# Altium PCB PCB1.PcbDoc
Units mil, origin at the board's own origin, x right, y up, seen from the top; angles counter-clockwise.
Board outline 830 x 850 mil, 2 copper layers (Top Layer, Bottom Layer); 15 components, 12 nets, 64 pads, 20 vias.
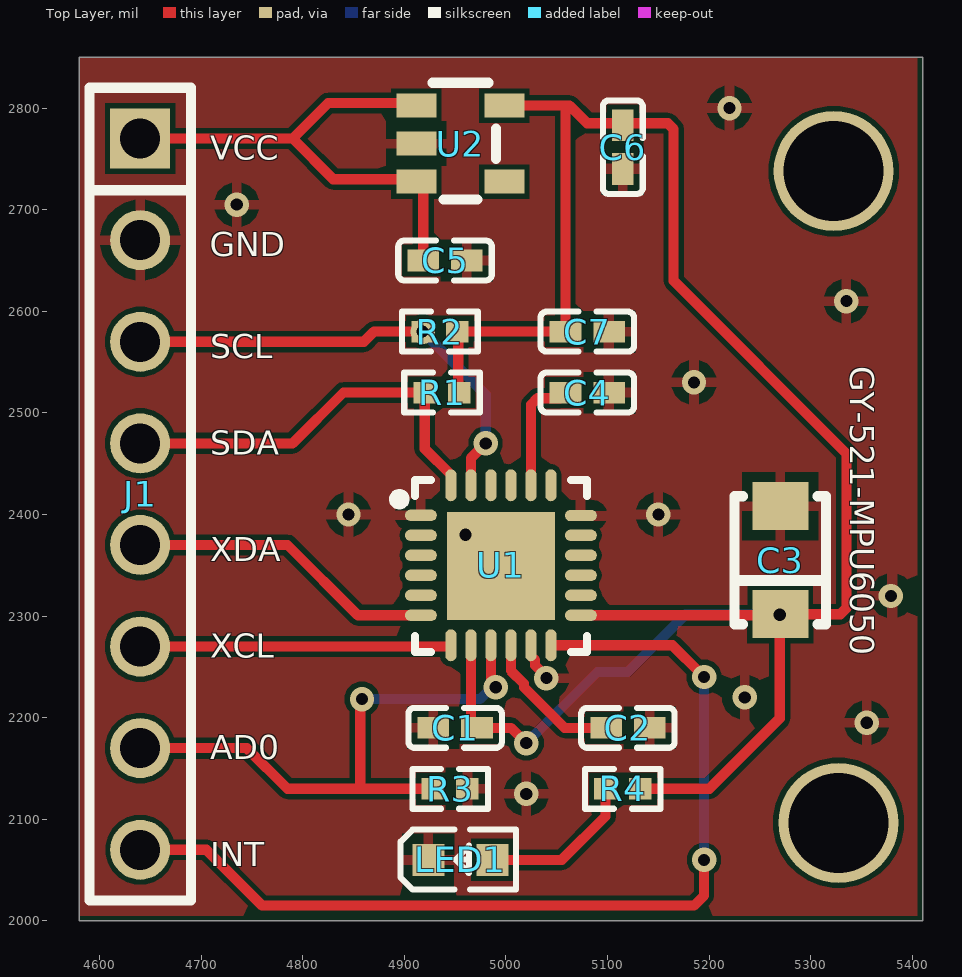
[diagram p0: Top Layer view]
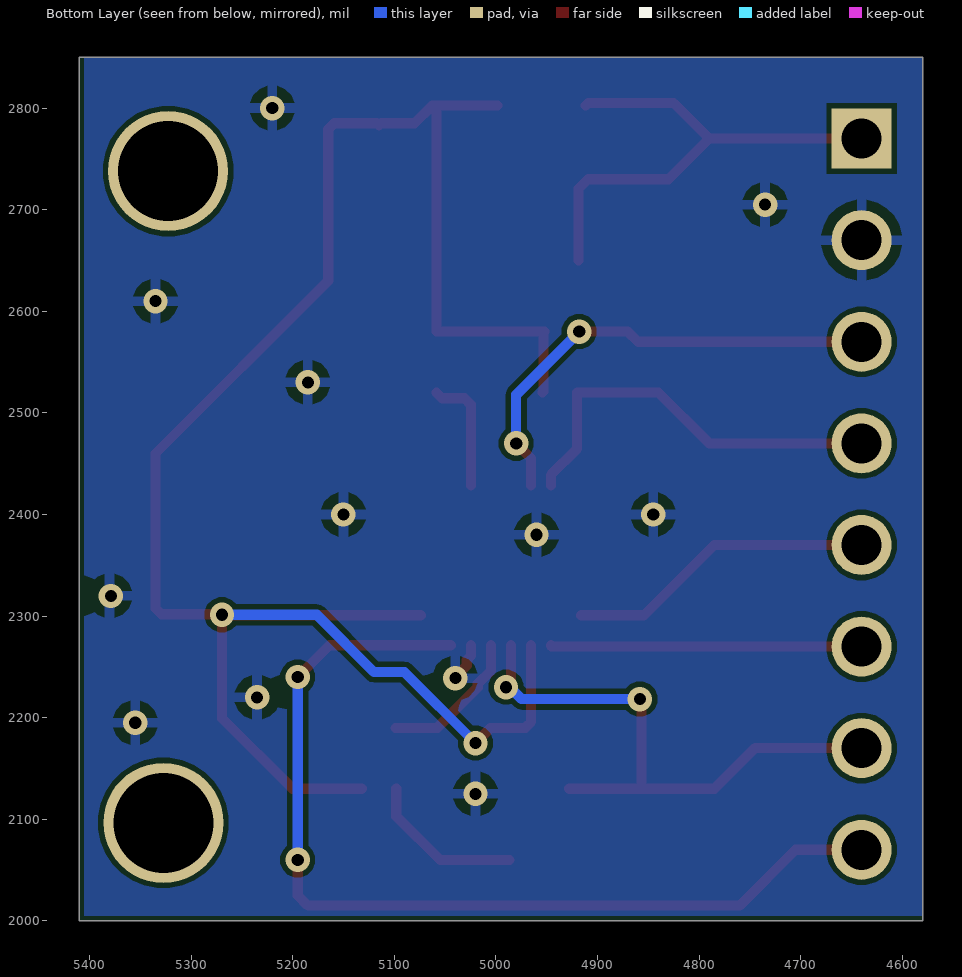
[diagram p1: Bottom Layer view, seen from below]

## Layer stack, top to bottom
Top Solder: solder mask 0.4, Solder Resist, Dk 3.5
Top Layer: signal copper 1.4
Dielectric 1: dielectric 12.6, FR-4, Dk 4.8
Bottom Layer: signal copper 1.4
Bottom Solder: solder mask 0.4, Solder Resist, Dk 3.5

## Board outline
4580,2000 4580,2850 5410,2850 5410,2000

## Design rules (kind name [scope] priority, off if disabled: settings)
Clearance [All] p1: gap=5 ignorepadtopadclearanceinfootprint=FALSE
PolygonConnect [All] p1: connectstyle=Relief reliefconductorwidth=10 reliefentries=4 polygonreliefangle="90 Angle" airgapwidth=10
RoutingVias [All] p1: holewidth=28 width=50 viastyle="Through Hole" minholewidth=28 minwidth=50 maxholewidth=28 maxwidth=50
SolderMaskExpansion [All] p1: expansion=4 istentingtop=FALSE
SupplyNets "Schematic Supply Nets_2" [InNet('GND')] p1: voltage=0.000
SupplyNets "Schematic Supply Nets_1" [InNet('+MAX6V')] p2: voltage=0.000
SupplyNets "Schematic Supply Nets" [InNet('+3V3')] p3: voltage=0.000
Width [All] p1: maxlimit=10 minlimit=10 preferedwidth=10
30 further rules are at their usual default settings.

## Components (designator, comment, footprint, x,y, rotation, side; value= is the part's Value field where it differs from the comment)
C1 "10nF" "C0402-10N F" 4950,2190 r180 top
C2 "10uF" "C0402-10u F" 5120,2190 r180 top
C3 "10uF" "CAP-SMD_L3.2-W1.6-10u F" 5270,2355 r90 top
C4 "2.2nF" "C0402-2.2n F" 5080,2520 r180 top
C5 "4.7uF" "C0402-4.7U F" 4940,2650 r180 top
C6 "10uF" "C0402-10u F" 5115,2761.46 r90 top
C7 "0.1uF" "C0402-0.1u f" 5080,2580 r180 top value=100nF
J1 "HDR-M-2.54_1x8" HDR-TH_8P-P2.54-V-M 4640,2420 r270 top
LED1 "LED-0603_R" LED0603-RD 4955,2060 r0 top
R1 "4.7kΩ" "R0402-4.7K ohm" 4937.04,2520 r0 top
R2 "4.7kΩ" "R0402-4.7K ohm" 4935,2580 r0 top
R3 "4.7kΩ" "R0402-4.7K ohm" 4945,2130 r180 top
R4 "2kΩ" "R0402-2.2K OHM" 5115,2130 r180 top
U1 "MPU-6050" QFN-24_L4.0-W4.0-P0.50-BL-EP2.7 4995,2350 r270 top
U2 "HX9193-33GB-N" SOT-23-5_L2.9-W1.6-P0.95-LS2.8-BL 4955,2765 r270 top

## Footprints (in the part's own frame and the unit in brackets; to place one, negate y for a bottom-side part, rotate by r counter-clockwise, add the part's x,y. Pads: shape width x height; smd on the part's side, far side on the other; paste and mask are expansions set on the pad)
"C0402-0.1u f" [mm]
  rect 0.79x0.54 smd paste-100 mask+0.051: 1(-0.545,0) 2(0.545,0)
  silkscreen extent -1.17,-0.5 1.17,0.5
"C0402-2.2n F" [mm]
  rect 0.79x0.54 smd paste-100 mask+0.051: 1(-0.545,0) 2(0.545,0)
  silkscreen extent -1.17,-0.5 1.17,0.5
"C0402-4.7U F" [mm]
  rect 0.79x0.54 smd paste-100 mask+0.051: 1(-0.545,0) 2(0.545,0)
  silkscreen extent -1.17,-0.5 1.17,0.5
"C0402-10N F" [mm]
  rect 0.79x0.54 smd paste-100 mask+0.051: 1(-0.545,0) 2(0.545,0)
  silkscreen extent -1.17,-0.5 1.17,0.5
"C0402-10u F" [mm]
  rect 0.79x0.54 smd paste-100 mask+0.051: 1(-0.545,0) 2(0.545,0)
  silkscreen extent -1.17,-0.5 1.17,0.5
"CAP-SMD_L3.2-W1.6-10u F" [mm]
  rect 1.2x1.4 smd: 1(-1.35,0) 2(1.35,0)
  silkscreen extent -1.6,-1.14 1.6,1.14
HDR-TH_8P-P2.54-V-M [mm]
  rect 1.5x1.5 hole 1: 1(-8.89,0)
  round 1.5 hole 1: 2(-6.35,0) 3(-3.81,0) 4(-1.27,0) 5(1.27,0) 6(3.81,0) 7(6.35,0) 8(8.89,0)
  silkscreen extent -10.16,-1.27 10.16,1.27
LED0603-RD [mm]
  rect 0.8x0.8 smd: 1(-0.799,0) 2(0.799,0)
  silkscreen extent -1.49,-0.75 1.39,0.76
QFN-24_L4.0-W4.0-P0.50-BL-EP2.7 [mm]
  oval 0.28x0.8 smd paste-100 mask+0.05: 1(-1.25,-2) 2(-0.75,-2) 3(-0.25,-2) 4(0.25,-2) 5(0.75,-2) 6(1.25,-2) 13(1.25,2) 14(0.75,2) 15(0.25,2) 16(-0.25,2) 17(-0.75,2) 18(-1.242,2)
  oval 0.8x0.28 smd paste-100 mask+0.05: 7(2,-1.25) 8(2,-0.75) 9(2,-0.25) 10(2,0.25) 11(2,0.75) 12(2,1.25) 19(-2,1.25) 20(-2,0.75) 21(-2,0.25) 22(-2,-0.25) 23(-2,-0.75) 24(-2,-1.25)
  rect 2.7x2.7 smd paste-100 mask+0.05: 25(0.012,0)
  silkscreen extent -2.14,-2.79 2.16,2.15
"R0402-2.2K OHM" [mm]
  rect 0.566x0.54 smd paste-100 mask+0.051: 1(-0.433,0) 2(0.433,0)
  silkscreen extent -0.94,-0.5 0.94,0.5
"R0402-4.7K ohm" [mm]
  rect 0.566x0.54 smd paste-100 mask+0.051: 1(-0.433,0) 2(0.433,0)
  silkscreen extent -0.94,-0.5 0.94,0.5
SOT-23-5_L2.9-W1.6-P0.95-LS2.8-BL [mm]
  rect 0.6x1 smd paste+0 mask+0.05: 1(-0.95,-1.1) 2(0,-1.1) 3(0.95,-1.1) 4(0.95,1.1) 5(-0.95,1.1)
  silkscreen extent -1.52,-0.7 1.4,0.89

## Part data
C1: library part CL05B103KB5NNNC, "50V 10nF X7R ±10% 0402 Multilayer Ceramic Capacitors MLCC - SMD/SMT ROHS", JLCPCB Part Class="Basic Part", LCSC Part Name="10nF ±10% 50V", Manufacturer=SAMSUNG(三星), Tolerance=±10%, Add into BOM=yes, Convert to PCB=yes, Datasheet=https://atta.szlcsc.com/upload/public/pdf/source/20160218/1457707763339.pdf, Device=CL05B103KB5NNNC, Manufacturer Part=CL05B103KB5NNNC, Supplier=LCSC, Supplier Footprint=0402, Supplier Part=C15195, Symbol=CL05B103KB5NNNC
C2 C6: library part CL05A106MP5NUNC_C315248, "10V 10uF X5R ±20% 0402 Multilayer Ceramic Capacitors MLCC - SMD/SMT ROHS", JLCPCB Part Class="Extended Part", LCSC Part Name="10uF ±20% 10V", Manufacturer=SAMSUNG(三星), Manufacturer Part=CL05A106MP5NUNC, Tolerance=±20%, Add into BOM=yes, Convert to PCB=yes, Datasheet=https://atta.szlcsc.com/upload/public/pdf/source/20231220/1EF805BAE1520675928CC4638D279E74.pdf, Device=CL05A106MP5NUNC_C315248, Supplier=LCSC, Supplier Footprint=0402, Supplier Part=C315248, Symbol=CL05A106MP5NUNC_C315248
C3: library part TPSA106K016R1000_C282116, "10uF 16V 1Ω@100kHz ±10% CASE-A-3216-18(mm) Tantalum Capacitors ROHS", Equivalent Series Resistance(ESR)=1Ω@100kHz, JLCPCB Part Class="Extended Part", LCSC Part Name="10uF ±10% 16V", Manufacturer="Kyocera AVX", Manufacturer Part=TPSA106K016R1000, Operating Temperature=-55℃~+125℃, Tolerance=±10%, Add into BOM=yes, Convert to PCB=yes, Datasheet=https://atta.szlcsc.com/upload/public/pdf/source/20181129/C308928_3E6DA6FC57C95F0966ACBCD944046350.pdf, Device=TPSA106K016R1000_C282116, Supplier=LCSC, Supplier Footprint=CASE-A-3216-18(mm), Supplier Part=C282116, Symbol=TPSA106K016R1000_C282116
C4: library part GCM155R71H222KA37D, "50V 2.2nF X7R ±10% 0402 Multilayer Ceramic Capacitors MLCC - SMD/SMT ROHS", JLCPCB Part Class="Extended Part", LCSC Part Name="2.2nF ±10% 50V", Manufacturer=muRata(村田), Temperature Coefficient=X7R, Tolerance=±10%, Voltage Rating=50V, Add into BOM=yes, Convert to PCB=yes, Datasheet=https://atta.szlcsc.com/upload/public/pdf/source/20170912/C126534_1505207904789963631.pdf, Device=GCM155R71H222KA37D, Manufacturer Part=GCM155R71H222KA37D, Supplier=LCSC, Supplier Footprint=0402, Supplier Part=C126534, Symbol=GCM155R71H222KA37D
C5: library part CL05A475MP5NRNC, "10V 4.7uF X5R ±20% 0402 Multilayer Ceramic Capacitors MLCC - SMD/SMT ROHS", JLCPCB Part Class="Basic Part", LCSC Part Name="4.7uF ±20% 10V", Manufacturer=SAMSUNG(三星), Tolerance=±20%, Add into BOM=yes, Convert to PCB=yes, Datasheet=https://atta.szlcsc.com/upload/public/pdf/source/20160218/1457707763339.pdf, Device=CL05A475MP5NRNC, Manufacturer Part=CL05A475MP5NRNC, Supplier=LCSC, Supplier Footprint=0402, Supplier Part=C23733, Symbol=CL05A475MP5NRNC
C7: library part GRM155R71H104KE14D, "50V 100nF X7R ±10% 0402 Multilayer Ceramic Capacitors MLCC - SMD/SMT ROHS", JLCPCB Part Class="Extended Part", LCSC Part Name="100nF ±10% 50V", Manufacturer=muRata(村田), Tolerance=±10%, Add into BOM=yes, Convert to PCB=yes, Datasheet=https://atta.szlcsc.com/upload/public/pdf/source/20180326/C77020_39BD49C951FF1AF0DB1F1FAC5AC1E401.pdf, Device=GRM155R71H104KE14D, Manufacturer Part=GRM155R71H104KE14D, Supplier=LCSC, Supplier Footprint=0402, Supplier Part=C77020, Symbol=GRM155R71H104KE14D
J1: library part Z-211-0811-0021-001, "Straight Policy 2.5mm 8P 6mm -25℃~+105℃ 3mm 2.54mm Single Row Black Brass 1x8P Plugin,P=2.54mm Pin Headers ROHS", Color=Black, Current Rating (Max)=-, JLCPCB Part Class="Extended Part", LCSC Part Name="间距:2.54mm 1x8P 直插 方针", Manufacturer=Nextron(正凌), Operating Temperature Range=-25℃~+105℃, Add into BOM=yes, Circluar Pins/Square Pins="Square Pins", Contact Plating=-, Convert to PCB=yes, Datasheet=https://atta.szlcsc.com/upload/public/pdf/source/20180525/C190820_686788E98164DB7F14582F9FE3B4A39E.pdf, Device=Z-211-0811-0021-001, Insulation Height=2.5mm, Length of End Connection Pin=3mm, Length of Mating Pin=6mm, Manufacturer Part=Z-211-0811-0021-001, Mounting Type=Straight, Number of Pins=8P, Number of Rows=Plugin, Pin Structure=1x8P, Pitch=2.54mm, Row Spacing=-, Supplier=LCSC, Supplier Footprint=插件,P=2.54mm, Supplier Part=C190820, Symbol=Z-211-0811-0021-001, Voltage Rating (Max)=-
LED1: library part 19-217/R6C-AL1M2VY/3T, "5mA Colorless Transparent Lens -40℃~+85℃ 617.5nm Red 120° 60mW 1.95V 0603 LED Indication - Discrete ROHS", Color Temperature=-, Emitted Color=Red, Forward Current=5mA, Forward Voltage (VF)=1.95V, JLCPCB Part Class="Extended Part", LCSC Part Name="红灯 停产 停产", Lens Color="Colorless Transparent Lens", Manufacturer=EVERLIGHT(亿光), Operating Temperature=-40℃~+85℃, Power Dissipation=60mW, Add into BOM=yes, Convert to PCB=yes, Datasheet=https://atta.szlcsc.com/upload/public/pdf/source/20160507/1462613613821.pdf, Device=19-217/R6C-AL1M2VY/3T, Diode Configuration=-, Dominant Wavelength=617.5nm, Manufacturer Part=19-217/R6C-AL1M2VY/3T, Mounting Sytle=-, Peak Wavelength=632nm, Supplier=LCSC, Supplier Footprint=0603, Supplier Part=C72044, Symbol=19-217/R6C-AL1M2VY/3T, Viewing Angle=120°
R1 R2 R3: library part RC0402FR-074K7L, "62.5mW Thick Film Resistors 50V ±100ppm/℃ ±1% 4.7kΩ 0402 Chip Resistor - Surface Mount ROHS", JLCPCB Part Class="Extended Part", LCSC Part Name="厚膜电阻 4.7kΩ ±1% 62.5mW", Manufacturer=YAGEO(国巨), Operating Temperature Range=-55℃~+155℃, Temperature Coefficient=±100ppm/℃, Tolerance=±1%, Add into BOM=yes, Convert to PCB=yes, Datasheet=https://atta.szlcsc.com/upload/public/pdf/source/20180821/C275644_0D56F95EFF785E7D9A1FEF436B37DA78.pdf, Device=RC0402FR-074K7L, Manufacturer Part=RC0402FR-074K7L, Supplier=LCSC, Supplier Footprint=0402, Supplier Part=C105871, Symbol=RC0402FR-074K7L, Type="Thick Film Resistors"
R4: library part RC0402FR-072KL, "62.5mW Thick Film Resistors 50V ±100ppm/℃ ±1% 2kΩ 0402 Chip Resistor - Surface Mount ROHS", JLCPCB Part Class="Extended Part", LCSC Part Name="厚膜电阻 2kΩ ±1% 62.5mW", Manufacturer=YAGEO(国巨), Operating Temperature Range=-55℃~+155℃, Temperature Coefficient=±100ppm/℃, Tolerance=±1%, Add into BOM=yes, Convert to PCB=yes, Datasheet=https://atta.szlcsc.com/upload/public/pdf/source/20180821/C275644_0D56F95EFF785E7D9A1FEF436B37DA78.pdf, Device=RC0402FR-072KL, Manufacturer Part=RC0402FR-072KL, Supplier=LCSC, Supplier Footprint=0402, Supplier Part=C60488, Symbol=RC0402FR-072KL, Type="Thick Film Resistors"
U1: "Accelerometer gyroscope QFN-24-EP(4x4) Accelerometers ROHS", JLCPCB Part Class="Extended Part", Manufacturer="TDK InvenSense(应美盛)", Operating Temperature=-40℃~+85℃, Add into BOM=yes, Convert to PCB=yes, Datasheet=https://atta.szlcsc.com/upload/public/pdf/source/20140425/1457707046159.pdf, Device=MPU-6050, LCSC Part Name=MPU-6050, Manufacturer Part=MPU-6050, Sensor Type=加速度计陀螺仪, Supplier=LCSC, Supplier Footprint=QFN-24-EP(4x4), Supplier Part=C24112, Symbol=MPU-6050_C24112
U2: "300mA Fixed 3.3V 7V SOT-23-5 Voltage Regulators - Linear, Low Drop Out (LDO) Regulators ROHS", JLCPCB Part Class="Extended Part", Manufacturer=HX(恒佳兴), Operating Temperature=-, Output Current=300mA, Output Voltage=3.3V, Add into BOM=yes, Convert to PCB=yes, Datasheet=https://atta.szlcsc.com/upload/public/pdf/source/20220412/18D9B33FD58646224E88440BBF52FED7.pdf, Device=HX9193-33GB-N, Features="Low ESR；Overcurrent Protection(OCP)；With ability", LCSC Part Name=HX9193-33GB-N, Manufacturer Part=HX9193-33GB-N, Noise=-, Number of Outputs=-, Output Configuration=-, Output Type=-, Power Supply Rejection Ratio (PSRR)=-, standby current=-, Supplier=LCSC, Supplier Footprint=SOT-23-5, Supplier Part=C2995655, Symbol=HX9193-33GB-N, Voltage - Supply=-, Voltage Dropout=-

## Free pads (board coordinates)
  round 118.11 hole 98.43 mask+3.94: 1(5322.57,2737.98) 1(5327.29,2096.53)

## Via types
v1: diameter 24, hole 12, Top Layer to Bottom Layer, tented both sides, 20 vias

## Nets (pads, with @x,y where several pads share a name; then routed paths per layer and width w, separated by ;. In a path a pad name is that pad's centre, name@x,y a point inside that pad or via, vN(x,y) a via of type N, cw(c..) or ccw(c..) an arc to the next point about the centre after c; other vN are vias at no path point)
+3V3: C1.1 C3.1 C6.2 C7.2 R1.2 R2.2 R4.1 U1.8 U1.13 U2.5 | length 2082.3
  Top Layer w10: R1.2 4953.06,2521.02 4953.06,2578.98 R2.2 C7.2 5058.54,2802.4 ; U1.8 4965.47,2195.63 4971.1,2190 C1.1 5005,2190 v1(5020,2175) ; U2.5 5058.54,2802.4 ; U1.13 5268.94,2300.79 C3.1 5329.14,2301.85 5335,2307.71 5335,2460 5165,2630 5165,2779.14 5159.14,2785 5117.08,2785 C6.2 5112.92,2785 5080,2785 5062.6,2802.4 5058.54,2802.4 ; R4.1 5200,2130 5269.47,2199.47 v1(5269.47,2301.32)
  Bottom Layer w10: v1(5020,2175) 5090,2245 5120,2245 5176.32,2301.32 v1(5269.47,2301.32)
+MAX6V: C5.2 J1.1 U2.1 U2.3 | length 506.9
  Top Layer w10: J1.1 4790,2770 ; U2.3 4909.29,2730 4830,2730 4790,2770 ; U2.1 4909.09,2805 4825,2805 4790,2770 ; U2.3 4918.54,2720.79 C5.2
AD0: J1.7 R3.2 U1.9 | length 575.9
  Top Layer w10: J1.7 4745,2170 4785,2130 4856.48,2130 ; v1@4860,2220 4856.48,2216.48 4856.48,2130 ; R3.2 4856.48,2130 ; U1.9 4985.16,2238.63 4990,2233.79 v1(4990,2230)
  Bottom Layer w10: v1(4858.24,2218.24) 4974.45,2218.24 4986.21,2230 v1(4990,2230)
GND: C1.2 C2.1 C3.2 C4.1 C5.1 C6.1 C7.1 J1.2 LED1.1 R3.1 U1.1 U1.11 U1.18 U1.25 U2.2 | length 38.6
  Top Layer w10: U1.11 5024.53,2260.75 5028.7,2256.58 5028.7,2251.3 5039.79,2240.21 v1(5039.79,2238.95)
  other v1: 5020,2125 5355,2195 5235,2220 5378.86,2319.71 4960,2380 4845,2400 5150,2400 5185,2530 5335,2610 4735,2705 5220,2800
INT: J1.8 U1.12 | length 955.9
  Top Layer w10: J1.8 4705,2070 4760,2015 5185,2015 5195,2025 v1(5195,2060) ; U1.12 5163.74,2271.26 v1@5191.6,2243.4
  Bottom Layer w10: v1(5195,2060) v1(5195,2240)
NetC2_2: C2.2 U1.10 | length 144
  Top Layer w10: U1.10 5004.84,2246.27 5017.79,2233.32 5017.79,2229.84 5057.63,2190 C2.2
NetC4_2: C4.2 U1.20 | length 118.3
  Top Layer w10: U1.20 5024.53,2508.04 5030.86,2514.37 5052.91,2514.37 C4.2
NetLED1_2: LED1.2 R4.2 | length 156.3
  Top Layer w10: LED1.2 5055.01,2060.01 5097.96,2102.96 R4.2
SCL: J1.3 R2.1 U1.23 | length 465.1
  Top Layer w10: J1.3 4860,2570 4870,2580 v1(4917.96,2580) ; U1.23 4965.47,2455.47 v1(4980,2470)
  Bottom Layer w10: v1(4917.96,2580) 4980,2517.96 v1(4980,2470)
SDA: J1.4 R1.1 U1.24 | length 402.7
  Top Layer w10: J1.4 4790,2470 4840,2520 R1.1 4920,2464.77 4945.79,2438.98 U1.24
XCL: J1.6 U1.7 | length 306.8
  Top Layer w10: J1.6 4945.32,2270 4945.79,2270.47 U1.7
XDA: J1.5 U1.6 | length 304.9
  Top Layer w10: J1.5 4785,2370 4854.21,2300.79 U1.6
pads on no net: U1.2 U1.3 U1.4 U1.5 U1.14 U1.15 U1.16 U1.17 U1.19 U1.21 U1.22 U2.4

## Polygon pours and split planes (outlines as drawn)
GND on Top Layer "GND_L01_P000" (solid, pour order 0): 4580,2850 5405,2850 5405,2005 4580,2005
GND on Bottom Layer "GND_L02_P001" (solid, pour order 1): 4580,2850 5405,2850 5405,2005 4580,2005

## Silkscreen, mask and mechanical layers (free items; w line width, h text height)
Top Overlay:
  text "VCC" at 4709,2749 h23.62
  text "GND" at 4708.51,2654 h23.62
  text "SCL" at 4709,2554 h23.62
  text "GY-521-MPU6050" at 5339,2546 h23.62 r270
  text "SDA" at 4709,2459 h23.62
  text "XDA" at 4709,2354 h23.62
  text "XCL" at 4709,2259 h23.62
  text "AD0" at 4709,2159 h23.62
  text "INT" at 4709,2054 h23.62
Mechanical 1:
  the board outline again, w10